# EAGLE board DXBlame (EAGLE 5.07)
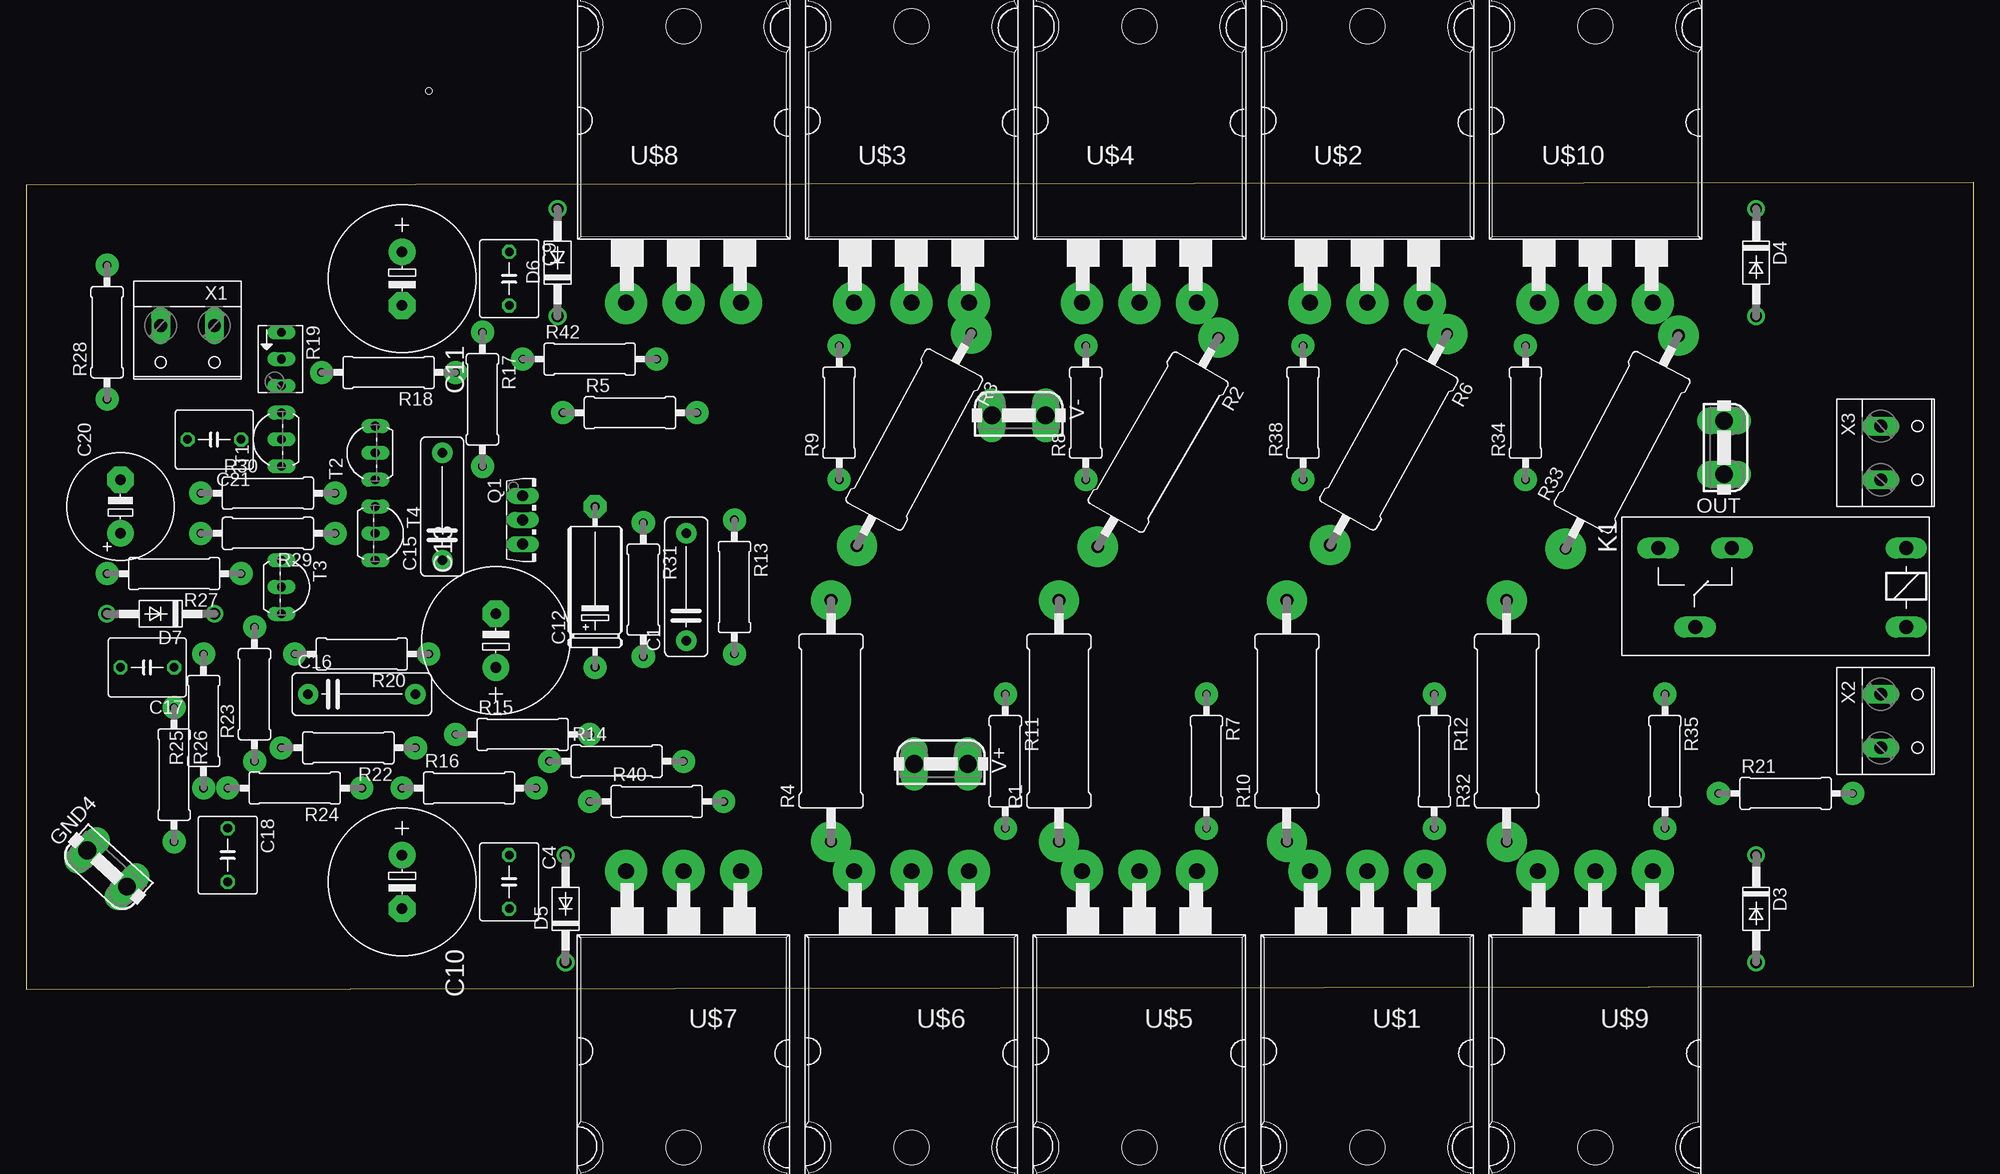
[diagram p0: board, top side]
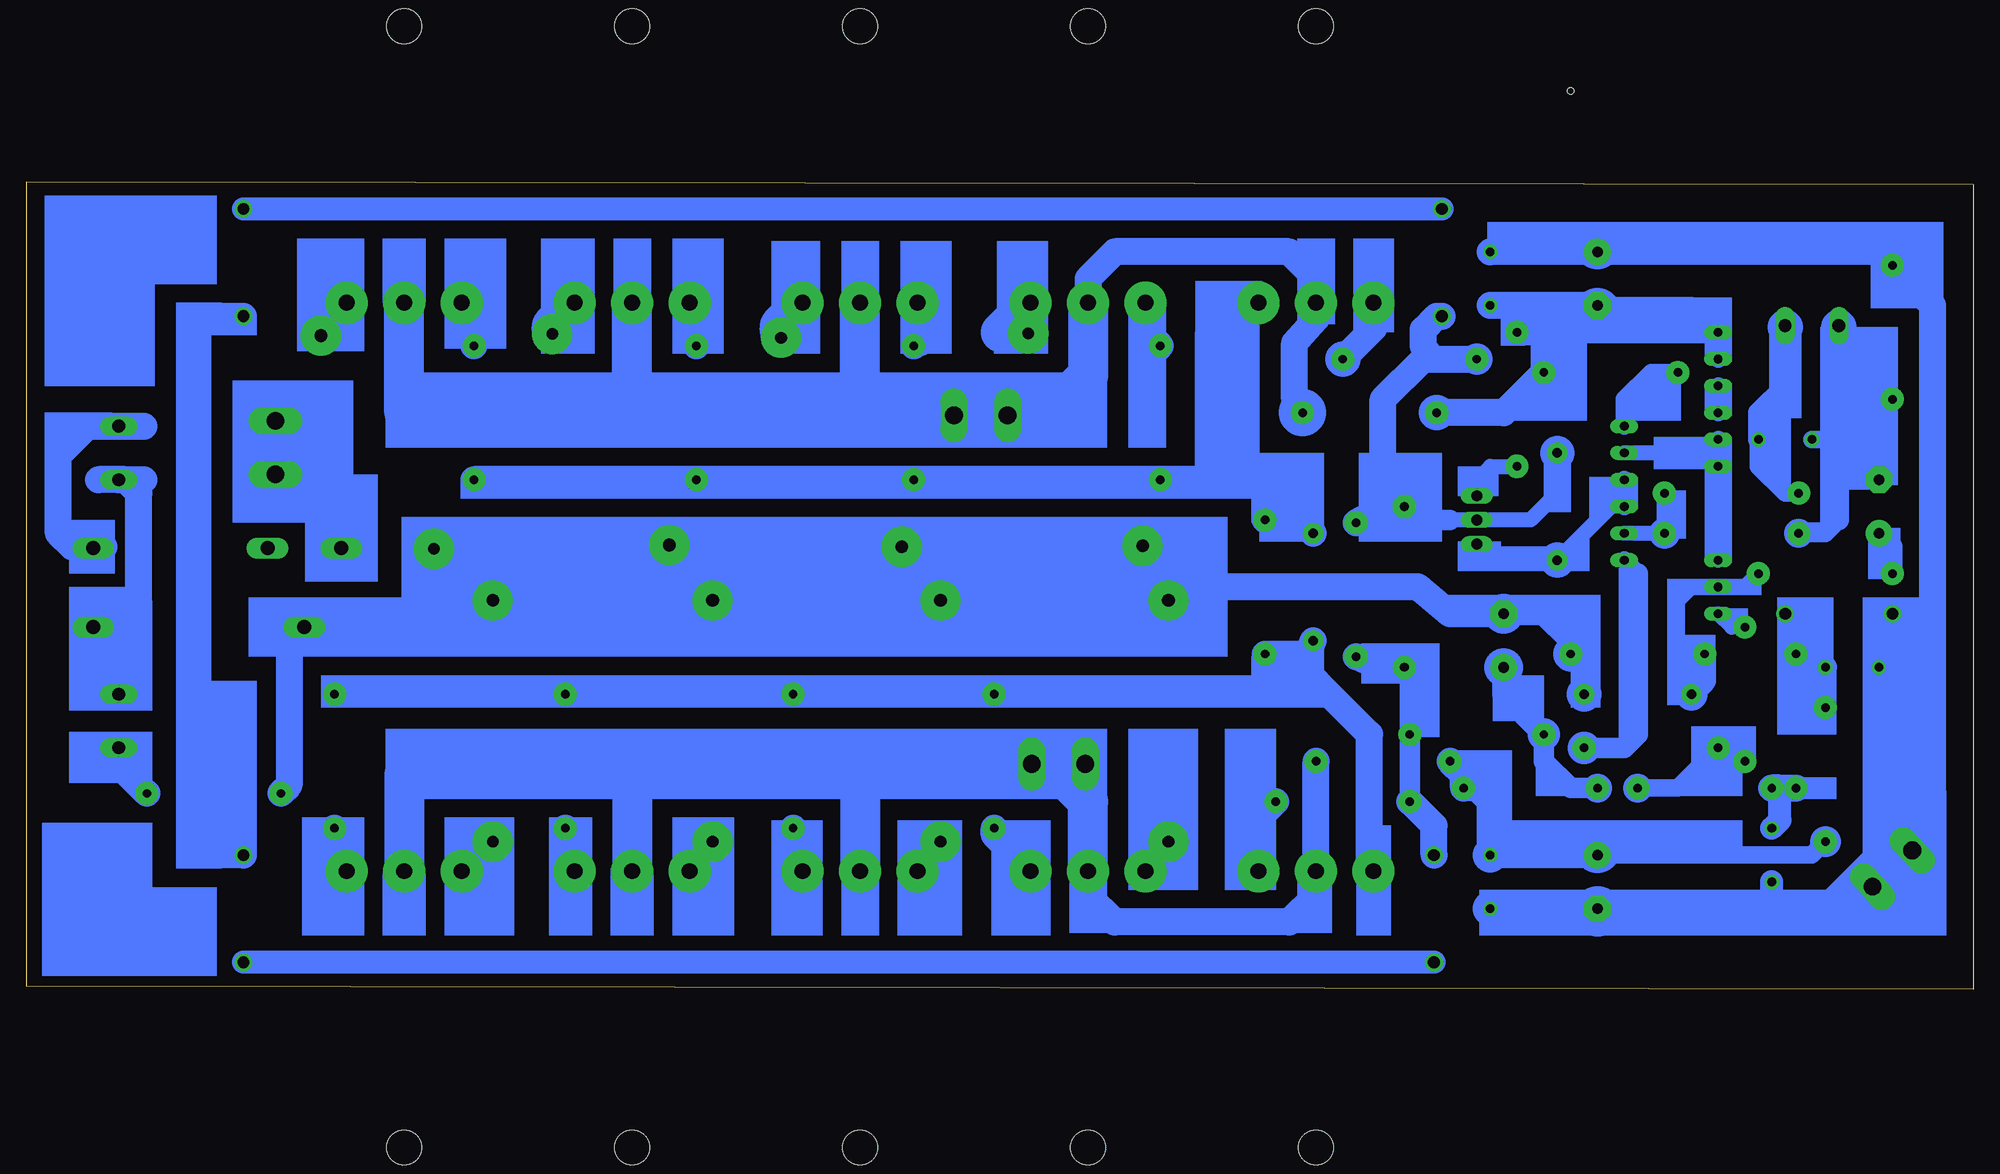
[diagram p1: board, bottom side, seen from below]

Size 184.4 x 76.45 mm. Coordinates in mm from the lower left corner, seen from the top.
Outline: 0,76.2 184.4,76.45 184.4,0.25 0,0 0,76.2
Copper layers (1*16): Top 0.035mm / dielectric 1.5mm / Bottom 0.035mm
Design rules "default *": minimum track width 10mil, minimum drill 30mil, track to track 8mil, track to pad 8mil, pad to pad 8mil, via to via 8mil, smd to smd 8mil, copper to edge 40mil, drill to drill 8mil, minimum pad ring 10mil, minimum via ring 8mil, stop-mask expansion 4mil, vias tented up to drill 0mil, thermal gap 10mil
Holes 0.6 mm at 38.12,-26.67 38.12,85.09 251.48,85.09

## Footprints (pad centres in the part's own frame; a part is rotated, then mirrored left to right if it is on the bottom)
C102-043X133 = drill 0.9 pad 1.93 round: 1 -5.08,0; 2 5.08,0
C050-055X075 = drill 0.813 octagon: 1 -2.54,0; 2 2.54,0
E5-13 = drill 1.016 pad 2.54 round: + -2.54,0 | drill 1.016 pad 2.54 octagon: - 2.54,0
E15-5 = drill 0.813 pad 2.159 round: + -7.62,0 | drill 0.813 pad 2.159 octagon: - 7.62,0
E5-10,5 = drill 1.016 pad 2.54 round: + -2.54,0 | drill 1.016 pad 2.54 octagon: - 2.54,0
DO41-10 = drill 1.118 round: A 5.08,0; C -5.08,0
FASTON = drill 1.676 pad 2.54 long: 1 -2.54,0; 2 2.54,0
G2R = drill 1.321 long: 1 -2.54,-3.683; 2 -2.54,3.81; O 13.97,-3.683; P 17.45,3.81; S 20.955,-3.683
TO126AV = drill 1.016 long: B 2.286,-1.27; C 0,-1.27; E -2.286,-1.27
0617/22 = drill 1.1 pad 3.81 round: 1 -11.43,0 | drill 1.2 pad 3.81 round: 2 11.43,0
0309/12 = drill 0.8 pad 2.184 round: 1 -6.35,0; 2 6.35,0
B64Y = drill 0.813 long: A 2.54,0; E -2.54,0; S 0,0
TO92-CBE = drill 0.813 long: B 0,0; C -2.54,0; E 2.54,0
TO-264 = drill 1.5 pad 4 round: B -5.45,-6.096; E 5.45,-6.096 | drill 1.499 pad 4 round: C 0,-6.096 | hole 3.3: 0,20.09
W237-132 = drill 1.194 long: 1 -2.54,-0.635; 2 2.54,-0.635

## Placement (x,y rotation side)
C1  .47  [C102-043X133]  62.5,38.1 90 top
C4  .1  [C050-055X075]  45.74,10.16 270 top
C9  .1  [C050-055X075]  45.74,67.31 270 top
C10  100uF  [E5-13]  35.58,10.16 270 top
C11  100uF  [E5-13]  35.58,67.31 270 top
C12  2.2uF  [E15-5]  53.87,38.1 90 top
C13  220uF  [E5-13]  44.47,33.02 90 top
C15  100pF  [C102-043X133]  39.39,45.72 90 top
C16  27pF  [C102-043X133]  31.77,27.94 0 top
C17  100nF  [C050-055X075]  11.45,30.48 180 top
C18  4.7nF  [C050-055X075]  19.07,12.7 270 top
C20  100uF  [E5-10,5]  8.91,45.72 90 top
C21  4.7nF  [C050-055X075]  17.8,52.07 180 top
D3  1N4004  [DO41-10]  163.85,7.62 270 top
D4  1N4004  [DO41-10]  163.85,68.83 270 top
D5  1N4004  [DO41-10]  51.07,7.62 90 top
D6  1N4004  [DO41-10]  50.31,68.83 90 top
D7  16V  [DO41-10]  12.72,35.56 180 top
GND4  GND  [FASTON]  7.64,11.43 317.7 top
K1  G2R  [G2R]  175.53,38.1 180 top
OUT  OUT  [FASTON]  160.8,51.31 90 top
Q1  MJE340  [TO126AV]  48.28,44.45 270 top
R1  .22R  [0617/22]  97.81,25.4 90 top
R2  .22R  [0617/22]  107.21,51.82 240 top
R3  .22R  [0617/22]  84.09,52.07 241.7 top
R4  .22R  [0617/22]  76.22,25.4 90 top
R5  47R  [0309/12]  57.17,54.61 0 top
R6  .22R  [0617/22]  129.05,52.07 241 top
R7  2.2R  [0309/12]  111.78,21.59 270 top
R8  2.2R  [0309/12]  100.35,54.61 90 top
R9  2.2R  [0309/12]  76.98,54.61 90 top
R10  .22R  [0617/22]  119.4,25.4 90 top
R11  2.2R  [0309/12]  92.73,21.59 270 top
R12  2.2R  [0309/12]  133.37,21.59 270 top
R13  100R  [0309/12]  67.08,38.1 270 top
R14  47R  [0309/12]  55.9,21.59 0 top
R15  3K3  [0309/12]  47.01,24.13 0 top
R16  3K3  [0309/12]  41.93,19.05 0 top
R17  22R  [0309/12]  43.2,55.88 270 top
R18  82R  [0309/12]  34.31,58.42 180 top
R19  100R  [B64Y]  24.15,59.69 270 top
R20  33K  [0309/12]  31.77,31.75 180 top
R21  22K  [0309/12]  166.64,18.54 0 top
R22  100R  [0309/12]  30.5,22.86 180 top
R23  100R  [0309/12]  21.61,27.94 90 top
R24  3K6  [0309/12]  25.42,19.05 180 top
R25  4K7  [0309/12]  16.78,25.4 90 top
R26  4K7  [0309/12]  13.99,20.32 270 top
R27  820R  [0309/12]  13.99,39.37 180 top
R28  10R  [0309/12]  7.64,62.23 90 top
R29  33K  [0309/12]  22.88,43.18 180 top
R30  820R  [0309/12]  22.88,46.99 0 top
R31  470R  [0309/12]  58.44,37.85 270 top
R32  .22R  [0617/22]  140.23,25.4 90 top
R33  .22R  [0617/22]  151.15,51.82 62.1 top
R34  2.2R  [0309/12]  142.01,54.61 90 top
R35  2.2R  [0309/12]  155.21,21.59 270 top
R38  2.2R  [0309/12]  120.92,54.61 90 top
R40  33R  [0309/12]  59.71,17.78 0 top
R42  33R  [0309/12]  53.36,59.69 0 top
T1  BC546B  [TO92-CBE]  24.15,52.07 90 top
T2  BC546B  [TO92-CBE]  33.04,50.8 90 top
T3  BC556A  [TO92-CBE]  24.15,38.1 270 top
T4  BC556A  [TO92-CBE]  33.04,43.18 270 top
U$1  2SC5200  [TO-264]  127.02,5.08 180 top
U$2  2SA1943  [TO-264]  127.02,71.12 0 top
U$3  2SA1943  [TO-264]  83.84,71.12 0 top
U$4  2SA1943  [TO-264]  105.43,71.12 0 top
U$5  2SC5200  [TO-264]  105.43,5.08 180 top
U$6  2SC5200  [TO-264]  83.84,5.08 180 top
U$7  2SC5200  [TO-264]  62.25,5.08 180 top
U$8  2SA1943  [TO-264]  62.25,71.12 0 top
U$9  2SC5200  [TO-264]  148.61,5.08 180 top
U$10  2SA1943  [TO-264]  148.61,71.12 0 top
V+  QFIT  [FASTON]  86.63,21.34 180 top
V-  QFIT  [FASTON]  94,54.36 180 top
X1  [W237-132]  15.26,62.23 180 top
X2  [W237-132]  176.3,25.4 270 top
X3  [W237-132]  176.3,50.8 270 top

## Library data of the parts
C1 C4 C9-C13 C15-C18 C20 C21 R1-R18 R20-R35 R38 R40 R42 = resistor
D3-D7 = diode
GND4 OUT V+ V- = keystone
K1 = relay
Q1 = transistor-power
R19 = pot
T1-T4 = transistor-neu-to92
U$1-U$10 = Rudi_TO264
X1-X3 = con-wago-508

## Nets
AGND: C20.- C21.2 R28.1 R29.2 X1.2
N$1: R1.1 U$5.E
N$2: R2.1 U$4.E
N$3: R3.1 U$3.E
N$4: R4.1 U$6.E
N$5: R11.2 U$6.B
N$6: R40.2 U$7.B
N$7: R7.2 U$5.B
N$8: R8.2 U$4.B
N$9: R9.2 U$3.B
N$10: R42.2 U$8.B
N$11: C12.+ D5.A R15.2 R31.2 R40.1
N$12: R14.2 U$1.C U$5.C U$6.C U$7.C U$9.C V+.1 V+.2
N$15: D3.C D4.A
N$16: C12.- C15.2 D6.C Q1.C R31.1 R42.1
N$17: D3.A D5.C
N$18: C1.2 R8.1 R9.1 R13.1 R34.1 R38.1 U$8.E
N$19: C1.1 R7.1 R11.1 R12.1 R13.2 R35.1 U$7.E
N$20: D4.C D6.A
N$21: C9.2 C11.- R5.1 R17.1 R18.1 R19.E R19.S
N$22: R6.1 U$2.E
N$24: R10.1 U$1.E
N$25: C4.1 C10.+ R14.1 R16.2 R26.2
N$26: R38.2 U$2.B
N$27: R12.2 U$1.B
N$28: R29.1 R30.2 T4.B
N$30: C21.1 R30.1 X1.1
N$31: C13.+ R15.1 R16.1
N$33: Q1.E R17.2
N$34: C16.1 R20.2 R27.1 T3.B
N$35: R18.2 T2.E
N$36: T1.B T1.C T2.B T3.C
N$37: R22.1 T4.E
N$38: C15.1 Q1.B T2.C T4.C
N$39: R19.A T1.E
N$40: R23.2 T3.E
N$41: R22.2 R23.1 R24.1
N$42: C18.1 R24.2 R25.1
N$43: C17.1 D7.C R25.2 R26.1
N$44: R32.1 U$9.E
N$46: C20.+ R27.2
N$47: R33.2 U$10.E
N$48: R35.2 U$9.B
N$49: R34.2 U$10.B
N$51: K1.S OUT.1 OUT.2
N$52: R21.2 X2.2
N$53: K1.2 X2.1 X3.2
N$54: K1.1 X3.1
N$74: R5.2 U$2.C U$3.C U$4.C U$8.C U$10.C V-.1 V-.2
PE: C4.2 C9.1 C10.- C11.+ C17.2 C18.2 D7.A GND4.1 GND4.2 R28.2
VCCIO: C13.- C16.2 K1.P R1.2 R2.2 R3.2 R4.2 R6.2 R10.2 R20.1 R21.1 R32.2 R33.1

## Tracks (layer width: path | path; a pad name or v marks a point on that pad's centre or on a via)
AGND
  Bottom 1.676: R29.2 13.99,43.18 12.72,44.45 12.72,48.26 12.72,53.34 13.99,52.07 C21.2
  Bottom 1.93: C20.- 12.72,48.26 | 12.72,44.45 12.72,55.88 | 12.72,55.88 X1.2 | 12.72,55.88 R28.1
N$1
  Bottom 3.81: U$5.E 97.81,13.35 R1.1
N$2
  Bottom 3.81: U$4.E 113.05,62.85 R2.1
N$3
  Bottom 3.81: U$3.E 92.08,62.23 R3.1
N$4
  Bottom 3.81: U$6.E 76.22,13.35 R4.1
N$5
  Bottom 2.54: U$6.B 92.73,14.62 R11.2
N$6
  Bottom 2.54: R40.2 67.7,16.14 U$7.B
N$7
  Bottom 2.54: U$5.B 111.78,12.08 R7.2
N$8
  Bottom 2.54: R8.2 98.96,61.58 U$4.B
N$9
  Bottom 2.54: R9.2 78.39,61.86 U$3.B
N$10
  Bottom 2.54: R42.2 56.8,62.6 U$8.B
N$11
  Bottom 1.93: C12.+ 53.36,29.21 R15.2 R40.1
  Bottom 2.54: R31.2 56.15,30.48 C12.+ | R40.1 51.07,15.49 D5.A
N$12
  Bottom 2.54: 83.84,11.43 U$6.C 83.84,8.89 81.3,6.35 64.79,6.35 62.25,8.89 U$7.C R14.2 | 145.31,22.61 145.05,22.35 145.05,21.84
  Bottom 3.81: 83.84,11.43 83.84,17.78 87.9,21.84 | 87.9,21.84 89.68,21.84 | 105.43,21.84 127.02,21.84 | 127.02,21.84 145.05,21.84 147.09,21.84 148.61,20.32 U$9.C | 127.02,21.84 U$1.C | 105.43,21.84 U$5.C | 89.68,21.84 V+.1 | 89.68,21.84 105.43,21.84 | V+.2 84.6,21.84 87.9,21.84
N$15
  Bottom 2.54: D4.A 166.9,63.75 168.42,62.48 168.42,14.22 166.9,12.7 D3.C
N$16
  Bottom 1.422: 49.55,44.45 Q1.C 41.93,44.45 39.39,46.99 C15.2
  Bottom 1.93: 49.55,44.45 53.36,44.45 C12.-
  Bottom 2.184: R42.1 50.82,59.69 52.09,60.96
  Bottom 2.54: R42.1 52.09,59.69 55.9,55.88 55.9,46.99 C12.- 55.65,45.72 R31.1 | D6.C 50.82,63.75 52.09,62.48 52.09,60.96
N$17
  Bottom 2.184: D5.C D3.A
N$18
  Bottom 2.54: 72.41,48.26 64.79,48.26 R13.1 63.27,44.45 C1.2 | 72.41,48.26 R9.1 R8.1 R38.1 R34.1 | U$8.E 67.95,64.77 69.87,64.77 72.41,62.23 72.41,48.26
N$19
  Bottom 2.54: 64.79,29.21 R13.2 63.01,31.75 C1.1 | U$7.E 57.17,11.55 57.17,24.13 62.25,29.21 64.79,29.21 | 64.79,29.21 66.06,27.94 R11.1 R7.1 R12.1 R35.1
N$20
  Bottom 2.184: D6.A D4.C
N$21
  Bottom 1.676: R19.S R19.E 26.69,64.77 C11.-
  Bottom 2.54: 40.66,63.5 39.39,64.77 C11.- | C9.2 41.93,64.77 40.66,63.5 | R5.1 44.47,54.61 R18.1 40.66,62.23 | 40.66,63.5 40.66,62.23 | 40.66,62.23 R17.1
N$22
  Bottom 3.81: U$2.E 134.64,62.85 R6.1
N$24
  Bottom 3.81: U$1.E 119.4,13.35 R10.1
N$25
  Bottom 1.676: R26.2 15.26,12.7 C10.+
  Bottom 2.54: C10.+ C4.1 45.74,17.78 47.01,19.05 R16.2 48.28,20.32 R14.1
N$26
  Bottom 2.54: R38.2 120.55,61.33 U$2.B
N$27
  Bottom 2.54: U$1.B 133.37,12.08 R12.2
N$28
  Bottom 1.422: R30.2 R29.1 T4.B
N$30
  Bottom 1.676: R30.1 17.8,46.99 20.34,49.53 C21.1
  Bottom 1.93: X1.1 17.8,57.15 20.34,54.61 C21.1
N$31
  Bottom 1.93: R16.1 38.12,19.05 40.66,21.59 R15.1
  Bottom 2.184: C13.+ 44.47,27.94 R15.1
N$33
  Bottom 1.422: R17.2 45.74,49.53 47.01,48.26 Q1.E
N$34
  Bottom 1.422: R20.2 26.69,31.75 27.96,33.02 27.96,36.83 26.69,38.1 T3.B 21.61,38.1 R27.1
  Bottom 2.184: R20.2 25.42,29.21 C16.1
N$35
  Bottom 1.676: R18.2 30.5,58.42 33.04,55.88 T2.E
N$36
  Bottom 1.422: 24.15,50.8 T2.B | T3.C T1.C
  Bottom 1.676: T1.C 24.15,50.8 T1.B
N$37
  Bottom 1.676: 31.77,39.37 T4.E
  Bottom 1.93: R22.1 33.04,22.86 31.77,24.13 31.77,39.37
N$38
  Bottom 1.422: Q1.B 47.01,40.64 C15.1 34.31,45.72 T4.C
  Bottom 1.676: T4.C T2.C
N$39
  Bottom 1.676: T1.E R19.A
N$40
  Bottom 1.422: R23.2 22.88,34.29 T3.E
N$41
  Bottom 1.676: R24.1 27.96,19.05 R22.2 22.88,22.86 R23.1
N$42
  Bottom 2.184: C18.1 18.31,16 18.31,19.05
  Bottom 2.54: R25.1 18.31,19.05 R24.2
N$43
  Bottom 1.676: R25.2 D7.C
  Bottom 2.184: R26.1 C17.1 16.53,30.48 R25.2
N$44
  Bottom 2.54: U$9.E 143.02,11.18 R32.1
N$46
  Bottom 1.93: C20.+ 7.64,41.91 R27.2
N$47
  Bottom 2.54: U$10.E 156.6,62.48 R33.2
N$48
  Bottom 2.54: U$9.B 155.21,12.33 R35.2
N$49
  Bottom 2.54: U$10.B 141.89,61.84 R34.2
N$51
  Bottom 3.81: 160.8,51.05 OUT.1 | OUT.2 160.8,51.31 160.8,51.05 | K1.S 154.45,41.91 154.45,44.7 160.8,51.05
N$52
  Bottom 2.54: R21.2 175.66,21.21 X2.2
N$53
  Bottom 2.54: 175.03,48.26 173.76,46.99 173.76,36.58 176.04,34.29 K1.2 178.07,30.35 X2.1 | 177.57,48.26 X3.2 175.03,48.26 | 175.03,48.26 173.25,48.26
N$54
  Bottom 2.54: 173.25,53.34 X3.1 178.58,53.34 181.38,50.55 181.38,43.18 180.11,41.91 177.06,41.91 177.19,41.78 K1.1
N$74
  Bottom 2.54: U$3.C 83.84,67.31 81.3,69.85 64.79,69.85 62.25,67.31 U$8.C 62.25,63.5 64.28,61.21 64.28,55.88 R5.2
  Bottom 3.81: 83.84,64.77 U$3.C 83.84,58.17 87.4,54.61 88.16,54.61 91.21,54.61 | V-.1 V-.2 91.21,54.61 | U$10.C 148.61,54.61 127.02,54.61 | 91.21,54.61 105.43,54.61 | 105.43,54.61 127.02,54.61 | 105.43,54.61 U$4.C | 127.02,54.61 U$2.C
PE
  Bottom 1.422: GND4.2 8.27,10.96 8.27,13.34
  Bottom 1.676: D7.A 8.91,34.29 C17.2 | 3.83,30.48 C17.2 | C17.2 8.91,24.13
  Bottom 2.184: 19.07,7.62 C18.2
  Bottom 2.54: C9.1 C11.+ 8.91,69.85 R28.2 3.83,64.77 3.83,30.48 3.83,17.78 8.27,13.34 13.99,7.62 19.07,7.62 C10.- C4.2
  Bottom 3.81: GND4.1 9.18,9.72 GND4.2
VCCIO
  Bottom 2.184: R1.2 95.27,39.37 R3.2 78.76,39.37 R4.2 | 110.51,39.37 113.05,36.83 | R10.2 132.1,36.83 R6.2 | C13.- 40.66,35.56 38.12,33.02 R20.1 36.85,30.48 C16.2
  Bottom 2.54: R3.2 110.51,39.37 R2.2 | R1.2 113.05,36.83 R10.2 | R1.2 arc90 94,39.37 R3.2 | R1.2 101.62,36.83 | R4.2 76.22,35.56 | C13.- 49.55,35.56 52.6,38.1 79.52,38.1 80.03,38.61 80.54,38.61 81.3,39.37 R3.2 | R6.2 137.43,36.83 R32.2 140.99,37.85 R33.1 | R21.1 159.53,19.3 159.53,33.53 158.77,34.29 K1.P
  Bottom 3.81: K1.P 143.78,34.29 141.24,36.83 R32.2
(copper drawn outside any net)
  shapes: Bottom area x210, Bottom circle x28